# Altium PCB Composite-Module.PcbDoc
Units mm, origin at the board's own origin, x right, y up, seen from the top; angles counter-clockwise.
Board outline 40 x 60 mm, 2 copper layers (Top Layer, Bottom Layer), stack 1.671 mm thick; 16 components, 12 nets, 54 pads, 14 vias.
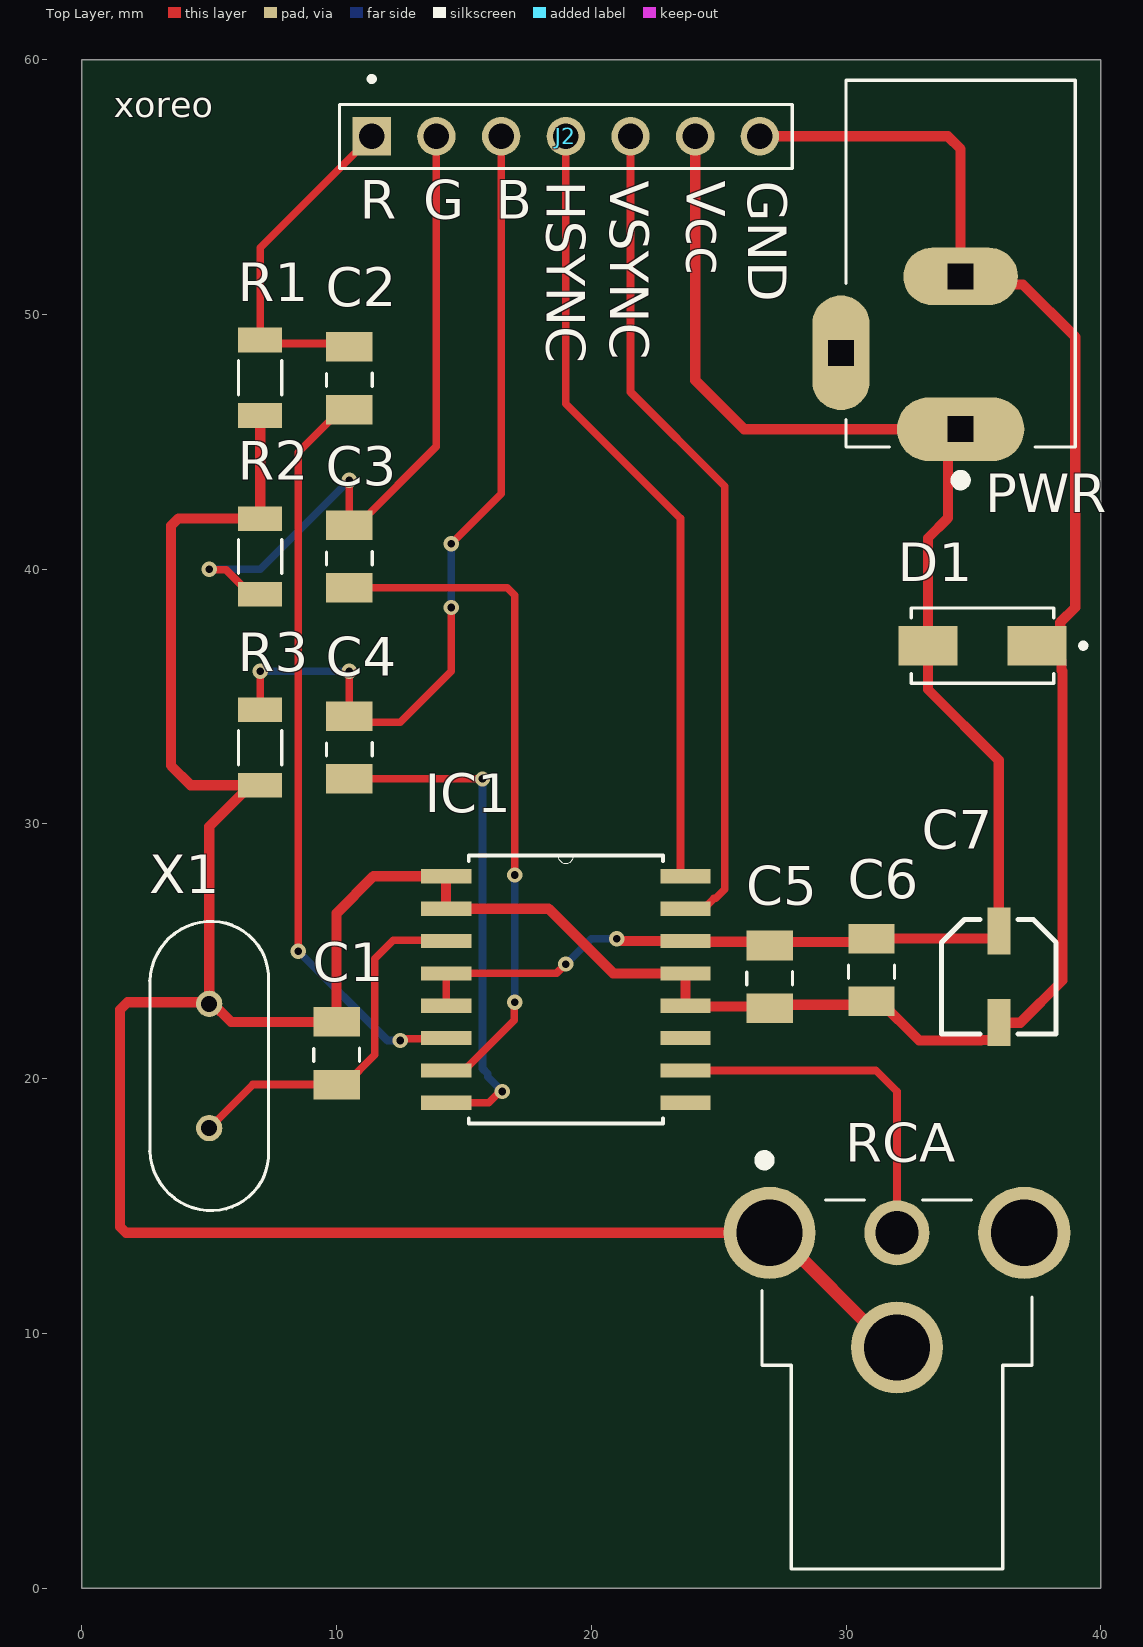
[diagram p0: Top Layer view]
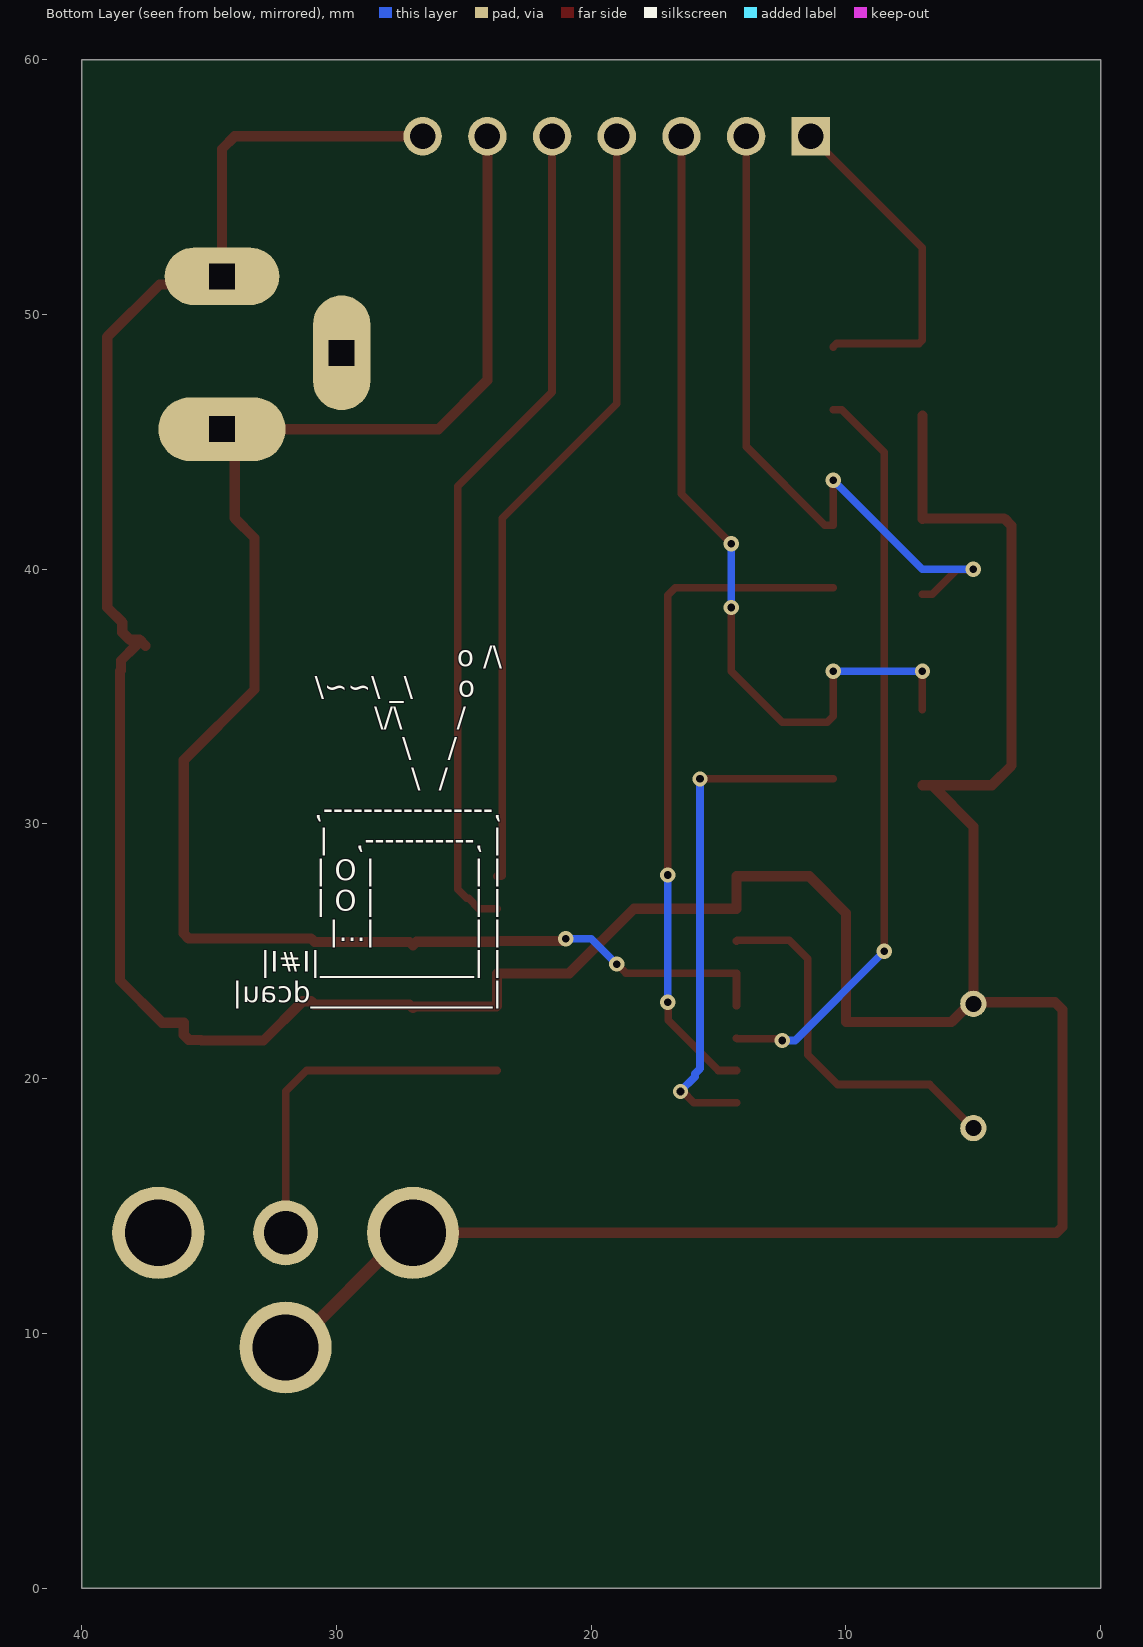
[diagram p1: Bottom Layer view, seen from below]
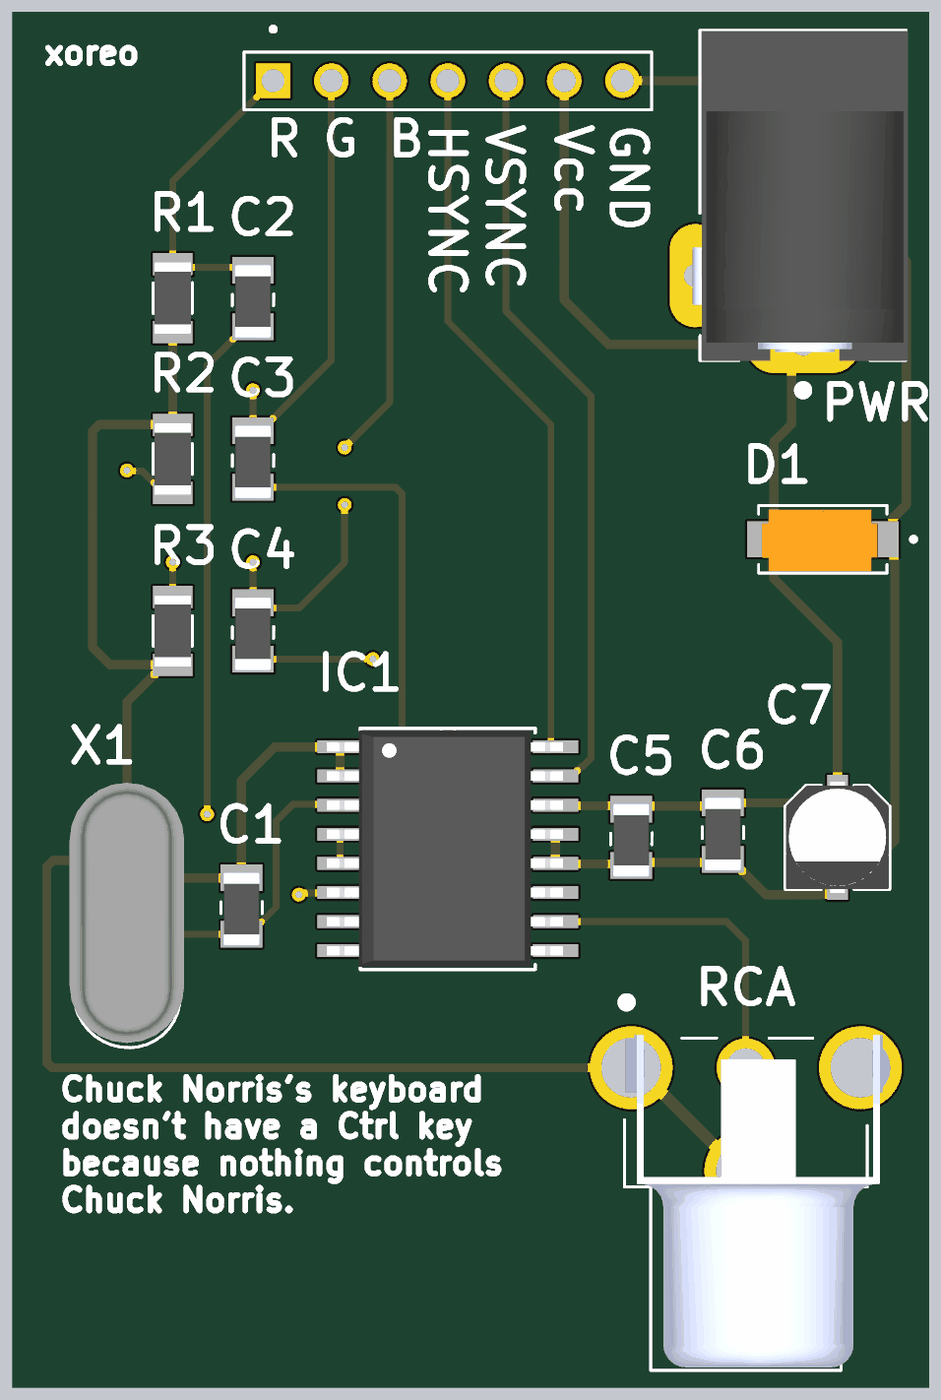
[diagram p2: 3D render of the assembled board from above, using the file's embedded part models]

## Layer stack, top to bottom
Top Solder: solder mask 0.0102, Solder Resist, Dk 3.5
Top Layer: signal copper 0.0356
Dielectric 1: dielectric 1.6, FR-4, Dk 4.8
Bottom Layer: signal copper 0.0356
Bottom Solder: solder mask 0.0102, Solder Resist, Dk 3.5

## Board outline
40,0 40,60 0,60 0,0

## Design rules (kind name [scope] priority, off if disabled: settings)
Clearance [All] p1: gap=0.3 ignorepadtopadclearanceinfootprint=FALSE
HoleSize [All] p1: absolutevalues=TRUE maxlimit=5 minlimit=0.025 maxpercent=80.000 minpercent=20.000
PolygonConnect [All] p1: connectstyle=Relief reliefconductorwidth=0.254 reliefentries=4 polygonreliefangle="90 Angle" airgapwidth=0.254
RoomDefinition Composite-Module [InComponentClass('Composite-Module')] p1: confinementstyle=ConfineIn formatcopy=TRUE lockcomponents=FALSE outline 0,0 40,0 40,60 0,60
RoutingVias [All] p1: holewidth=0.3 width=0.6 viastyle="Through Hole" minholewidth=0.3 minwidth=0.6 maxholewidth=0.3 maxwidth=0.6
SolderMaskExpansion [All] p1: expansion=0.102 istentingtop=FALSE
Width [All] p1: maxlimit=1 minlimit=0.3 preferedwidth=0.5
29 further rules are at their usual default settings.

## Components (designator, comment, footprint, x,y, rotation, side; value= is the part's Value field where it differs from the comment)
C1 "4.7pF 1206" "CAPACITOR 1206" 10,21 r90 top
C2 "100nF" "CAPACITOR 1206" 10.5,47.5 r90 top
C3 "100nF" "CAPACITOR 1206" 10.5,40.5 r90 top
C4 "100nF" "CAPACITOR 1206" 10.5,33 r90 top
C5 "100nF" "CAPACITOR 1206" 27,24 r90 top
C6 "100nF" "CAPACITOR 1206" 31,24.27 r90 top
C7 "100µF" ELCO 36,24 r270 top
D1 "1N4001" DIODE 33.22,37 r180 top
IC1 "AD724 SOP16" AD724 19,23.5 r0 top
J2 "7 PIN HDR" "7 HDR" 27.89,55.73 r0 top
PWR "DC Jack connector" "DC JACK" 34.5,45.5 r90 top (schematic designator J3)
R1 "75R" "RESISTOR 1206" 7,47.52 r90 top
R2 "75R" "RESISTOR 1206" 7,40.5 r270 top
R3 "75R" "RESISTOR 1206" 7,33 r90 top
RCA "RCA jack" "RCA JACK" 32,8 r90 top (schematic designator J1)
X1 "4.433MHz" "XTAL 4.4436 MHZ" 5,20.5 r90 top

## Footprints (in the part's own frame and the unit in brackets; to place one, negate y for a bottom-side part, rotate by r counter-clockwise, add the part's x,y. Pads: shape width x height; smd on the part's side, far side on the other; paste and mask are expansions set on the pad)
"7 HDR" [mm] "1x7 pin header"
  rect 1.508x1.508 hole 1: 1(-16.51,1.27)
  round 1.508 hole 1: 2(-13.97,1.27) 3(-11.43,1.27) 4(-8.89,1.27) 5(-6.35,1.27) 6(-3.81,1.27) 7(-1.27,1.27)
  silkscreen extent -17.78,0 0,3.62
AD724 [mil] "AD724 SOP16"
  rect 78x22 smd: 1(-185,175) 2(-185,125) 3(-185,75) 4(-185,25) 5(-185,-25) 6(-185,-75) 7(-185,-125) 8(-185,-175) 9(185,-175) 10(185,-125) 11(185,-75) 12(185,-25) 13(185,25) 14(185,75) 15(185,125) 16(185,175)
  silkscreen extent -150,-207 150,207, body extent -208,-203 198,203, height 103
"CAPACITOR 1206" [mm] "100nF & 4.7pF"
  rect 1.16x1.82 smd: 1(-1.23,0) 2(1.23,0)
  silkscreen extent -0.32,-0.9 0.2,0.9, body extent -1.73,-0.8 1.47,0.8, height 0.85
"DC JACK" [mm] "DC power jack connector"
  oval 2.5x5 hole 1 square: 1(0,0)
  oval 2.25x4.5 hole 1 square: 2(6,0)
  oval 4.5x2.25 hole 1 square: 3(3,4.7)
  silkscreen extent -2.2,-4.5 13.7,4.5, body extent -0.72,-4.57 13.68,4.83, height 11
DIODE [mm] "SMD DIODE"
  rect 2.33x1.56 smd: 1(-4.28,0) 2(0,0)
  silkscreen extent -6.2,-1.48 0.66,1.48, body extent -4.54,-1.3 0.51,1.4, height 2.19
ELCO [mm] "ELCO CAP"
  rect 1.85x0.9 smd: 1(-1.8,0) 2(1.8,0)
  silkscreen extent -2.25,-2.25 2.25,2.25, body extent -2.42,-2.25 2.42,2.25, height 6.1
"RCA JACK" [mm] "RCA Jack"
  round 3.616 hole 2.6: 1(5.95,5) 3(1.45,0) 4(5.95,-5)
  round 2.55 hole 1.7: 2(5.95,0)
  silkscreen extent -7.25,-5.3 9,5.4, body extent -7.12,-6.35 7.38,5.25, height 12.4
"RESISTOR 1206" [mm]
  rect 0.97x1.73 smd: 1(-1.48,0) 2(1.48,0)
  silkscreen extent -0.67,-0.85 0.67,0.85, body extent -1.55,-0.8 1.55,0.8, height 0.65
"XTAL 4.4436 MHZ" [mm] "XTAL 4.4436 MHz"
  round 1.03 hole 0.63: 1(-2.44,0) 2(2.44,0)
  silkscreen extent -5.68,-2.33 5.68,2.33, body extent -5.47,-2.5 5.88,2.5, height 13.46

## Part data
C1: library part "Capacitor: 4.7pF", "1206 4.7 pF 50 V ±0.25 pF Tolerance C0G/NP0 SMT Multilayer Ceramic Capacitor", Capacitance=4.7pF, Case Code (Imperial)=1206, Case Code (Metric)=3216, Dielectric=C0G, Manufacturer="Kyocera AVX", Manufacturer Part Number=12065A4R7CAT2A, Max Operating Temperature=125°C, Min Operating Temperature=-55°C, Package Quantity=1, Supplier Part Number 1=1356810, Voltage Rating=50V, Case/Package=1206, Category="Ceramic Capacitors", ComponentLink1Description=https://datasheet.ciiva.com/152/ccog-152054.pdf?src-supplier=Digi-Key, ComponentLink1URL=https://datasheet.ciiva.com/152/ccog-152054.pdf?src-supplier=Digi-Key, ComponentLink2Description=https://datasheet.ciiva.com/152/ccog-152055.pdf?src-supplier=Digi-Key, ComponentLink2URL=https://datasheet.ciiva.com/152/ccog-152055.pdf?src-supplier=Digi-Key, ComponentLink3Description=https://datasheet.ciiva.com/11551/ccog-11551671.pdf?src-supplier=Avnet, ComponentLink3URL=https://datasheet.ciiva.com/11551/ccog-11551671.pdf?src-supplier=Avnet, ComponentLink4Description=https://datasheet.ciiva.com/152/ccog-152056.pdf?src-supplier=Digi-Key, ComponentLink4URL=https://datasheet.ciiva.com/152/ccog-152056.pdf?src-supplier=Digi-Key, ComponentLink5Description=https://datasheet.ciiva.com/16390/ccog-16390684.pdf?src-supplier=Future+Electronics, ComponentLink5URL=https://datasheet.ciiva.com/16390/ccog-16390684.pdf?src-supplier=Future+Electronics, Construction=Flat, Depth=1.6mm, Dissipation Factor=2.5%, Height=0.5mm, Lead Free="Lead Free", Length=3.2mm, Mount="Surface Mount", Packaging="Tape and Reel", Pricing 1="100=0,19200, 500=0,13300, 1000=0,11900 (EUR)", Radiation Hardening=No, RoHS=Yes, RoHS Compliant=Yes, Series=-, Stock 1=1800, Supplier 1=Rs, Termination=SMD/SMT, Thickness=0.037inch, Voltage Rating (DC)=50V, Width=1.6mm
C2 C3 C4 C5 C6: library part "Capacitor: 100nF", "Ceramic capacitor SMD-1206 100nF /50V X7R# K +-10%, AVX, RoHS, /4000 reel/", Case Code (Imperial)=1206, Case Code (Metric)=3216, Dielectric=X7R, Dielectric Material=Ceramic, Insulation Resistance=100GR, Manufacturer="Kyocera AVX", Manufacturer Part Number=12065C104KAT2A, Max Operating Temperature=125°C, Min Operating Temperature=-55°C, Package Quantity=1, Supplier Part Number 1=2281081, Tolerance=10%, Voltage=50V, Capacitance=100nF, Case/Package=1206, Category="Ceramic Capacitors", ComponentLink1Description=https://datasheet.ciiva.com/11786/0900766b80ed4be2-11786988.pdf?src-supplier=Rs, ComponentLink1URL=https://datasheet.ciiva.com/11786/0900766b80ed4be2-11786988.pdf?src-supplier=Rs, ComponentLink2Description=https://datasheet.ciiva.com/2988/cx7r-2988135.pdf?src-supplier=Avnet, ComponentLink2URL=https://datasheet.ciiva.com/2988/cx7r-2988135.pdf?src-supplier=Avnet, ComponentLink3Description=https://datasheet.ciiva.com/16375/cx7r-16375719.pdf?src-supplier=Future+Electronics, ComponentLink3URL=https://datasheet.ciiva.com/16375/cx7r-16375719.pdf?src-supplier=Future+Electronics, ComponentLink4Description=https://datasheet.ciiva.com/2988/cx7r-2988136.pdf?src-supplier=Avnet, ComponentLink4URL=https://datasheet.ciiva.com/2988/cx7r-2988136.pdf?src-supplier=Avnet, ComponentLink5Description=https://datasheet.ciiva.com/7833/cx7r-7833405.pdf?src-supplier=Element14, ComponentLink5URL=https://datasheet.ciiva.com/7833/cx7r-7833405.pdf?src-supplier=Element14, ComponentLink6Description=https://datasheet.ciiva.com/25796/cx7r-25796358.pdf?src-supplier=Farnell, ComponentLink6URL=https://datasheet.ciiva.com/25796/cx7r-25796358.pdf?src-supplier=Farnell, ComponentLink7Description=https://datasheet.ciiva.com/7833/cx7r-7833402.pdf?src-supplier=Element14, ComponentLink7URL=https://datasheet.ciiva.com/7833/cx7r-7833402.pdf?src-supplier=Element14, ComponentLink8Description=https://datasheet.ciiva.com/150/cx7r-150390.pdf?src-supplier=Digi-Key, ComponentLink8URL=https://datasheet.ciiva.com/150/cx7r-150390.pdf?src-supplier=Digi-Key, ComponentLink9Description=https://datasheet.ciiva.com/150/cx7r-150389.pdf?src-supplier=Digi-Key, ComponentLink9URL=https://datasheet.ciiva.com/150/cx7r-150389.pdf?src-supplier=Digi-Key, ComponentLink10Description=https://datasheet.ciiva.com/150/cx7r-150391.pdf?src-supplier=Digi-Key, ComponentLink10URL=https://datasheet.ciiva.com/150/cx7r-150391.pdf?src-supplier=Digi-Key, ComponentLink11Description=https://datasheet.ciiva.com/7833/cx7r-7833403.pdf?src-supplier=Element14, ComponentLink11URL=https://datasheet.ciiva.com/7833/cx7r-7833403.pdf?src-supplier=Element14, ComponentLink12Description=https://datasheet.ciiva.com/7833/cx7r-7833404.pdf?src-supplier=Element14, ComponentLink12URL=https://datasheet.ciiva.com/7833/cx7r-7833404.pdf?src-supplier=Element14, ComponentLink13Description=https://datasheet.ciiva.com/5415/cx7r-218113-5415909.pdf?src-supplier=Mouser, ComponentLink13URL=https://datasheet.ciiva.com/5415/cx7r-218113-5415909.pdf?src-supplier=Mouser, ComponentLink14Description=https://datasheet.ciiva.com/14584/70001075-14584956.pdf?src-supplier=Allied+Electronics, ComponentLink14URL=https://datasheet.ciiva.com/14584/70001075-14584956.pdf?src-supplier=Allied+Electronics, Construction=Flat, Contact Plating=Tin,Matte, Depth=1.6mm, Dissipation Factor=2.5%, Height=0.94mm, Lead Free="Lead Free", Length=3.2mm, Mount="Surface Mount,PCB", Number of Pins=2, Packaging="Tape and Reel", Pricing 1="4000=0,02600, 20000=0,02520, 40000=0,02440 (EUR)", Radiation Hardening=No, Reach SVHC Compliant=Yes, RoHS=Yes, RoHS Compliant=Yes, Series=-, Stock 1=188000, Supplier 1=Farnell, Termination=SMD/SMT, Thickness=0.037inch, Voltage Rating=50V, Voltage Rating (DC)=50V, Width=1.6mm
C7: library part "Capacitor: 100µF (elco)", "CAP ALUM 100UF 20% 10V SMD", Capacitance=100uF, Case/Package=Radial, Manufacturer=Panasonic, Manufacturer Part Number=EEE-1AA101WR, Max Operating Temperature=85°C, Min Operating Temperature=-40°C, Package Quantity=1000, Ratings=AEC-Q200, Ripple Current=50mA, Supplier Part Number 1=1766372, Tolerance=20%, Voltage Rating=10V, Category="Aluminum Electrolytic Capacitors", ComponentLink1Description=https://datasheet.ciiva.com/26945/getdatasheetpartid-169213-26945071.pdf?src-supplier=Verical, ComponentLink1URL=https://datasheet.ciiva.com/26945/getdatasheetpartid-169213-26945071.pdf?src-supplier=Verical, ComponentLink2Description=https://datasheet.ciiva.com/24027/aba0000ce2-40801-24027541.pdf?src-supplier=Mouser, ComponentLink2URL=https://datasheet.ciiva.com/24027/aba0000ce2-40801-24027541.pdf?src-supplier=Mouser, ComponentLink3Description=https://datasheet.ciiva.com/14598/70255710-14598233.pdf?src-supplier=Allied+Electronics, ComponentLink3URL=https://datasheet.ciiva.com/14598/70255710-14598233.pdf?src-supplier=Allied+Electronics, ComponentLink4Description=https://datasheet.ciiva.com/14605/70255710-14605689.pdf?src-supplier=Allied+Electronics, ComponentLink4URL=https://datasheet.ciiva.com/14605/70255710-14605689.pdf?src-supplier=Allied+Electronics, ComponentLink5Description=https://datasheet.ciiva.com/11673/aba0000ce2-11673882.pdf?src-supplier=Avnet, ComponentLink5URL=https://datasheet.ciiva.com/11673/aba0000ce2-11673882.pdf?src-supplier=Avnet, ComponentLink6Description=https://datasheet.ciiva.com/16427/aba0000ce2-16427544.pdf?src-supplier=Future+Electronics, ComponentLink6URL=https://datasheet.ciiva.com/16427/aba0000ce2-16427544.pdf?src-supplier=Future+Electronics, ComponentLink7Description=https://datasheet.ciiva.com/2983/aba0000ce2-2983906.pdf?src-supplier=Avnet, ComponentLink7URL=https://datasheet.ciiva.com/2983/aba0000ce2-2983906.pdf?src-supplier=Avnet, ComponentLink8Description=https://datasheet.ciiva.com/30075/11aba0000ce2-30075303.pdf?src-supplier=Onlinecomponents.com, ComponentLink8URL=https://datasheet.ciiva.com/30075/11aba0000ce2-30075303.pdf?src-supplier=Onlinecomponents.com, Construction=Cylindrical, Contact Plating=Tin, Diameter=5mm, Height=5.4mm, Height - Seated (Max)=0.213inch, Lead Free="Lead Free", Length=5.5mm, Life (Hours)=1000Hour, Mount="Surface Mount,PCB", Packaging="Tape and Reel", Pricing 1="50=0,23400, 250=0,13800, 500=0,11000 (EUR)", Radiation Hardening=No, Ripple Current (AC)=50mA, RoHS=Yes, RoHS Compliant=Yes, Series=S, Stock 1=2900, Supplier 1=Rs, Termination=SMD/SMT, Voltage Rating (DC)=10V
D1: library part "Diode: 1N4001", "Rectifier Diode Switching 100V 1A 2000ns 2-Pin SMA T/R", Average Rectified Current=1A, Case/Package=DO-214AC, Forward Voltage=1V, Manufacturer=MCC, Manufacturer Part Number=GS1B-LTP, Max Operating Temperature=150°C, Max Reverse Current=50uA, Max Reverse Voltage (DC)=100V, Max Surge Current=30A, Min Operating Temperature=-55°C, Package Quantity=1, Category="Rectifier Diodes", ComponentLink1Description=https://datasheet.ciiva.com/911/gs1a-lgs1m-ldo-214ac-911885.pdf?src-supplier=Digi-Key, ComponentLink1URL=https://datasheet.ciiva.com/911/gs1a-lgs1m-ldo-214ac-911885.pdf?src-supplier=Digi-Key, ComponentLink2Description=https://datasheet.ciiva.com/911/gs1a-lgs1m-ldo-214ac-911886.pdf?src-supplier=Digi-Key, ComponentLink2URL=https://datasheet.ciiva.com/911/gs1a-lgs1m-ldo-214ac-911886.pdf?src-supplier=Digi-Key, ComponentLink3Description=https://datasheet.ciiva.com/911/gs1a-lgs1m-ldo-214ac-911887.pdf?src-supplier=Digi-Key, ComponentLink3URL=https://datasheet.ciiva.com/911/gs1a-lgs1m-ldo-214ac-911887.pdf?src-supplier=Digi-Key, Element Configuration=Single, Lead Free="Lead Free", Mount="Surface Mount", Number of Pins=2, Packaging="Tape and Reel", Peak Non-Repetitive Surge Current=30A, Pricing 1="1=0,24370, 10=0,20390, 25=0,20230, 100=0,11440, 250=0,11330, 500=0,07600, 1000=0,05260, 3000=0,03660 (USD)", Reverse Recovery Time=2us, Reverse Voltage=100V, RoHS=Yes, RoHS Compliant=Yes, Series=GS1B, Stock 1=4511, Supplier 1="Arrow Electronics", Supplier Part Number 1=GS1B-LTP
IC1: library part "IC: AD724", "RGB to NTSC and PAL Encoder 16-Pin SOIC W Tube", Case/Package=SOIC, Manufacturer="Analog Devices", Manufacturer Part Number=AD724JRZ, Max Operating Temperature=70°C, Max Power Dissipation=800mW, Max Supply Voltage=5.25V, Min Operating Temperature=0°C, Min Supply Voltage=4.75V, Nominal Supply Current=33mA, Operating Supply Current=42mA, Operating Supply Voltage=5V, Package Quantity=47, Supplier Part Number 1=4023716, Bandwidth=5MHz, Category="Decoders and Multiplexers", ComponentLink1Description=https://datasheet.ciiva.com/1778/ad724-1778742.pdf?src-supplier=Digi-Key, ComponentLink1URL=https://datasheet.ciiva.com/1778/ad724-1778742.pdf?src-supplier=Digi-Key, ComponentLink2Description=https://datasheet.ciiva.com/1140/83869-1140251.pdf?src-supplier=Element14, ComponentLink2URL=https://datasheet.ciiva.com/1140/83869-1140251.pdf?src-supplier=Element14, ComponentLink3Description=https://datasheet.ciiva.com/3245/ad724-3245391.pdf?src-supplier=Avnet, ComponentLink3URL=https://datasheet.ciiva.com/3245/ad724-3245391.pdf?src-supplier=Avnet, Contact Plating=Tin,Matte, Height=2.35mm, Lead Free="Contains Lead", Length=10.5mm, Mount="Surface Mount", Number of Channels=3, Number of Pins=16, Packaging=Rail/Tube, Pricing 1="1=20,54000, 10=18,88000, 47=18,10000, 141=15,95000, 282=15,17000, 517=14,19000 (EUR)", Reach SVHC Compliant=Yes, RoHS=Yes, RoHS Compliant=Yes, Series=-, Stock 1=46, Supplier 1=Farnell, Supply Current=33mA, Width=7.6mm
J2: library part "CONNECTOR: 7 PIN HDR", "7 pin header"
PWR: library part "Connector: DC Jack", "2.0 x 6.5 mm, 2.5 A, Horizontal, Through Hole, Dc Power Jack Connector", Color=Black, Current Rating=2.5A, Flammability Rating="UL94 V-0", Insulation Resistance=50MR, Manufacturer=CUI, Manufacturer Part Number=PJ-002A, Max Operating Temperature=85°C, Min Operating Temperature=-25°C, Package Quantity=500, Voltage Rating=24V, Category=Uncategorized, ComponentLink1Description=http://www.mouser.com/ds/2/670/pj-002a-515880.pdf?src-supplier=Mouser, ComponentLink1URL=http://www.mouser.com/ds/2/670/pj-002a-515880.pdf?src-supplier=Mouser, ComponentLink2Description=http://www.cui.com/Product/Resource/FuturePDF/PJ-002A.pdf?src-supplier=Future+Electronics, ComponentLink2URL=http://www.cui.com/Product/Resource/FuturePDF/PJ-002A.pdf?src-supplier=Future+Electronics, ComponentLink3Description=https://www.cui.com/product/resource/digikeypdf/pj-002a.pdf?src-supplier=Digi-Key, ComponentLink3URL=https://www.cui.com/product/resource/digikeypdf/pj-002a.pdf?src-supplier=Digi-Key, Connector Type=Jack, Contact Gender=Male, Contact Material="Copper Alloy,Copper", Contact Plating=Tin,Nickel, Diameter=2.1mm, Gender=Male, Housing Color=Black, Housing Material=Thermoplastic, Lead Free="Lead Free", Mount="Through Hole", Number of Conductors=2, Orientation=Horizontal, Packaging=Bulk, RoHS=Yes, RoHS Compliant=Yes, Series=-, Shielding=Unshielded, Supplier 1="Arrow Electronics", Supplier Part Number 1=PJ-002A, Termination="Through Hole"
R1 R2 R3: library part "Resistor: 75R", "Res Thin Film 1206 75 Ohm 0.1% 1/4W ±25ppm/°C Molded SMD SMD Punched Carrier T/R", Case Code (Imperial)=1206, Case Code (Metric)=3216, Manufacturer=Panasonic, Manufacturer Part Number=ERA-8AEB750V, Max Operating Temperature=155°C, Max Power Dissipation=250mW, Min Operating Temperature=-55°C, Package Quantity=5000, Ratings=AEC-Q200, Resistance Tolerance=0.1%, Resistor Type="Thin Film,Metal Film", Supplier Part Number 1=1841731, Temperature Coefficient=25ppm/°C, Voltage Rating=150V, Case/Package=1206, Category="Chip SMD Resistors", ComponentLink1Description=https://datasheet.ciiva.com/48529/era-eng-tds-48529837.pdf?src-supplier=Distrelec, ComponentLink1URL=https://datasheet.ciiva.com/48529/era-eng-tds-48529837.pdf?src-supplier=Distrelec, ComponentLink2Description=https://datasheet.ciiva.com/24061/aoa0000ce26-197354-24061558.pdf?src-supplier=Mouser, ComponentLink2URL=https://datasheet.ciiva.com/24061/aoa0000ce26-197354-24061558.pdf?src-supplier=Mouser, ComponentLink3Description=https://datasheet.ciiva.com/9187/aoa0000ce26-9187734.pdf?src-supplier=Avnet, ComponentLink3URL=https://datasheet.ciiva.com/9187/aoa0000ce26-9187734.pdf?src-supplier=Avnet, Construction=Rectangular, Contact Plating=Tin, Depth=1.6mm, Features="Automotive AEC-Q200", Height=0.6mm, Lead Free="Lead Free", Length=3.2mm, Military Standard=Not, Mount="Surface Mount", Number of Pins=2, Number of Terminations=2, Packaging="Tape and Reel", Power Rating=250mW, Pricing 1="10=0,39700, 100=0,17300, 500=0,14200, 1000=0,14100, 2500=0,13900, 5000=0,13800, 25000=0,13600, 50000=0,13500 (EUR)", Radiation Hardening=No, Reach SVHC Compliant=Yes, Resistance=75R, RoHS=Yes, RoHS Compliant=Yes, Series=ERA-8A, Stock 1=2826, Supplier 1=Farnell, Technology="THIN FILM", Termination=SMD/SMT, Tolerance=0.1%, Voltage Rating (DC)=150V, Width=1.6mm
RCA: library part "Connector: RCA female", "Conn RCA RCP 4 POS Solder RA SMD 2 Terminal 1 Port T/R", Body Color=Silver, Case/Package=Metal, Insulation Color=Yellow, Manufacturer=CUI, Manufacturer Part Number=RCJ-014-SMT-TR, Body Material=Steel, Category=Uncategorized, ComponentLink1Description=https://datasheet.ciiva.com/7368/rcj-01x-smt-7368731.pdf?src-supplier=Digi-Key, ComponentLink1URL=https://datasheet.ciiva.com/7368/rcj-01x-smt-7368731.pdf?src-supplier=Digi-Key, ComponentLink2Description=https://datasheet.ciiva.com/7368/rcj-01x-smt-7368734.pdf?src-supplier=Digi-Key, ComponentLink2URL=https://datasheet.ciiva.com/7368/rcj-01x-smt-7368734.pdf?src-supplier=Digi-Key, Contact Plating=Tin, Gender=Female, Mount="Surface Mount", Packaging="Tape and Reel", RoHS=No, RoHS Compliant=No, Series=RCJ, Shielding=Unshielded, Supplier 1="Arrow Electronics", Supplier Part Number 1=RCJ-014-SMT-TR, Termination=Solder
X1: library part "Crystal: 4.433MHz", "Crystal 10MHz 30pF 2-Pin HC-49/U Loose", Frequency=10MHz, Frequency Stability=50ppm, Frequency Tolerance=30ppm, Load Capacitance=30pF, Manufacturer=Multicomp, Manufacturer Part Number=HC49S-10-30-50-70-30-ATF, Max Operating Temperature=70°C, Min Operating Temperature=-20°C, Supplier Part Number 1=1666999, Category=Crystals, ComponentLink1Description=http://www.farnell.com/datasheets/1661828.pdf?src-supplier=Farnell, ComponentLink1URL=http://www.farnell.com/datasheets/1661828.pdf?src-supplier=Farnell, ComponentLink2Description=http://www.farnell.com/datasheets/1661828.pdf?src-supplier=Element14, ComponentLink2URL=http://www.farnell.com/datasheets/1661828.pdf?src-supplier=Element14, Mount="Through Hole", Number of Pins=2, Pricing 1="1=0,39200, 2=0,35100, 3=0,31800, 5=0,31100, 10=0,30300, 20=0,27800, 50=0,25900, 100=0,23300 (EUR)", Reach SVHC Compliant=Yes, RoHS=Yes, RoHS Compliant=Yes, Stock 1=320, Supplier 1=Farnell

## Via types
v1: diameter 0.6, hole 0.3, Top Layer to Bottom Layer, 14 vias

## Nets (pads, with @x,y where several pads share a name; then routed paths per layer and width w, separated by ;. In a path a pad name is that pad's centre, name@x,y a point inside that pad or via, vN(x,y) a via of type N, cw(c..) or ccw(c..) an arc to the next point about the centre after c; other vN are vias at no path point)
GND: C1.2 C5.1 C6.1 C7.2 D1.1 IC1.1 IC1.2 IC1.12 IC1.13 J2.7 PWR.2 R1.1 R2.1 R3.1 RCA.1 RCA.3 X1.2 | length 164
  Top Layer w0.4: R3.1 R3.1@6.62,31.52 ; R1.1 R2.1 6.98,42 3.793,42 3.5,41.707 3.5,32.293 4.273,31.52 R3.1@6.62,31.52 ; J2.7 34,57 34.5,56.5 PWR.2 34.82,51.18 36.945,51.18 39,49.125 39,38.5 38.415,37.915 38.415,37.53 38.116,37.231 37.731,37.231 D1.1 ; RCA.1 1.734,13.95 1.5,14.184 1.5,22.707 1.793,23 4.94,23 X1.2 ; D1.1@37.885,37 38.465,36.42 38.465,36.035 38.5,36 38.5,23.857 36.843,22.2 C7.2 36,21.725 35.8,21.525 35.325,21.525 35.3,21.5 32.87,21.5 31.33,23.04 C6.1 30.865,22.905 27.135,22.905 C5.1 26.935,22.836 23.728,22.836 IC1.12 IC1.13 20.865,24.135 18.325,26.675 IC1.2 IC1.1 11.445,27.945 10,26.5 C1.2 5.854,22.23 5.143,22.94 X1.2 ; X1.2 5,29.9 R3.1@6.62,31.52
  Top Layer w0.5: RCA.1 27.25,13.95 31.75,9.45 RCA.3
NetC1_1: C1.1 IC1.3 X1.1 | length 14.6
  Top Layer w0.3: X1.1 6.71,19.77 C1.1 10.33,19.77 11.5,20.94 11.5,24.707 12.227,25.434 14.272,25.434 IC1.3
NetC2_1: C2.1 IC1.6 | length 29.6
  Top Layer w0.3: v1(8.5,25) 8.5,44.6 10.17,46.27 C2.1 ; v1(12.5,21.5) 12.527,21.5 12.593,21.566 14.272,21.566 IC1.6
  Bottom Layer w0.3: v1(8.5,25) 12,21.5 v1(12.5,21.5)
NetC2_2: C2.2 J2.1 R1.2 | length 13.4
  Top Layer w0.3: C2.2 10.365,48.865 7.135,48.865 R1.2 7,52.62 J2.1
NetC3_1: C3.1 IC1.7 | length 26.8
  Top Layer w0.3: C3.1 16.707,39.27 17,38.977 v1(17,28) ; IC1.7 15.012,20.325 16.981,22.294 16.981,22.981 v1(17,23)
  Bottom Layer w0.3: v1(17,23) v1(17,28)
NetC3_2: C3.2 J2.2 R2.2 | length 28
  Top Layer w0.3: v1(5,40) 5.019,39.981 5.659,39.981 6.62,39.02 R2.2 ; v1(10.5,43.5) C3.2 10.83,41.73 13.92,44.82 J2.2
  Bottom Layer w0.3: v1(5,40) 7,40 v1(10.5,43.5)
NetC4_1: C4.1 IC1.8 | length 20.2
  Top Layer w0.3: C4.1 v1(15.73,31.77) ; IC1.8 15.974,19.055 16.419,19.5 v1(16.5,19.5)
  Bottom Layer w0.3: v1(15.73,31.77) 15.73,20.4 15.928,20.201 15.928,20.072 v1(16.5,19.5)
NetC4_2: C4.2 J2.3 R3.2 | length 33.5
  Top Layer w0.3: R3.2 v1(7,36) ; v1(10.5,36) C4.2 10.73,34 12.5,34 14.5,36 v1(14.5,38.5) ; v1(14.5,41) 16.46,42.96 J2.3
  Bottom Layer w0.3: v1(7,36) v1(10.5,36) ; v1(14.5,38.5) v1(14.5,41)
NetC5_2: C5.2 C6.2 C7.1 D1.2 IC1.4 IC1.5 IC1.14 J2.6 PWR.1 | length 65.5
  Top Layer w0.3: IC1.5 IC1.4 18.635,24.135 v1(19,24.5)
  Top Layer w0.4: v1(21,25.5) 21.027,25.5 21.122,25.405 IC1.14 23.728,25.376 26.854,25.376 C5.2 27.135,25.365 30.865,25.365 C6.2 35.8,25.5 36,25.7 C7.1 36,32.5 33.22,35.28 D1.2 33.22,41.229 34,42.009 PWR.1@34,45.076 ; J2.6 24.08,47.42 26,45.5 PWR.1
  Bottom Layer w0.3: v1(19,24.5) 20,25.5 v1(21,25.5)
NetIC1_10: IC1.10 RCA.2 | length 14.2
  Top Layer w0.3: IC1.10 31.175,20.325 32,19.5 RCA.2
NetIC1_15: IC1.15 J2.5 | length 33
  Top Layer w0.3: J2.5 21.54,46.96 25.24,43.26 25.24,27.438 24.886,27.084 24.819,27.084 24.41,26.675 IC1.15
NetIC1_16: IC1.16 J2.4 | length 31.1
  Top Layer w0.3: J2.4 19,46.5 23.5,42 23.5,27.974 23.529,27.945 IC1.16
pads on no net: IC1.9 IC1.11 PWR.3 RCA.4

## Silkscreen, mask and mechanical layers (free items; w line width, h text height)
Top Overlay:
  text "xoreo" at 1.254,57.754 h1
  text "HSYNC" at 18.254,55.246 h1.52 r270
  text "VSYNC" at 20.754,55.246 h1.52 r270
  text "Vcc" at 23.754,55.246 h1.52 r270
  text "GND" at 26.171,55.246 h1.52 r270
  text "R" at 10.914,53.754 h1.52
  text "G" at 13.397,53.754 h1.52
  text "B" at 16.254,53.754 h1.52
  text "Chuck Norris's keyboard doesn't have a Ctrl key because nothing controls Chuck Norris." at 2,1 h1
Bottom Overlay:
  text "/\ o  /    o     /_ /~~/ /     \      /\/ /      \    /    /       \  /    / ,-----------------, / | ,-----------,   | / | |           | O | / | |           | O | / | |           |...| / | |___________|I#I| / |_____________dcau|" at 23.5,23 h0.8
Board outline:
  the board outline again, w0.127
Mechanical 13:
  text "Vcc" at 1.754,52.754 h1.52

## Text inside footprints (layer, text, board x,y; h text height)
IC1: Mechanical 13 "*" at 13.483,28.382 h1.27